# Altium PCB Soccer_Bop_It_Schematic.PcbDoc
Units mil, origin at the board's own origin, x right, y up, seen from the top; angles counter-clockwise.
Board outline 3010 x 2010 mil, 2 copper layers (Top Layer, Bottom Layer); 16 components, 16 nets, 72 pads, 3 vias.
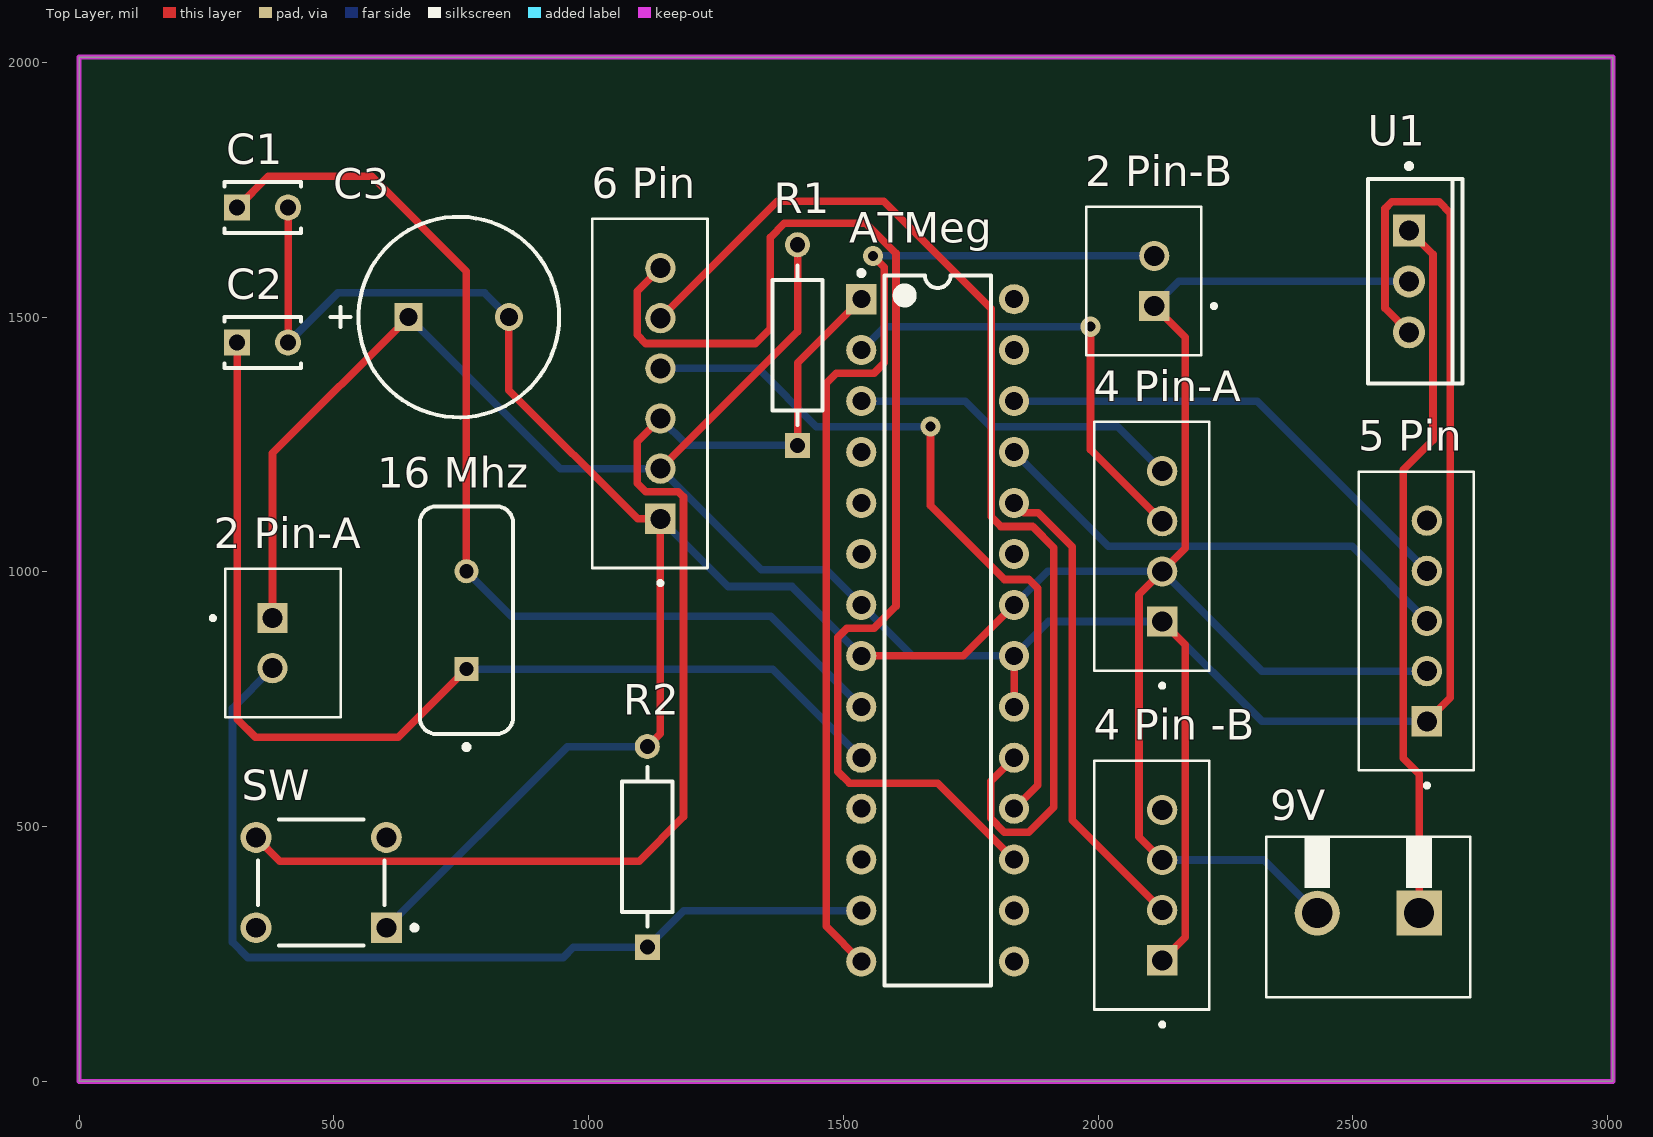
[diagram p0: Top Layer view]
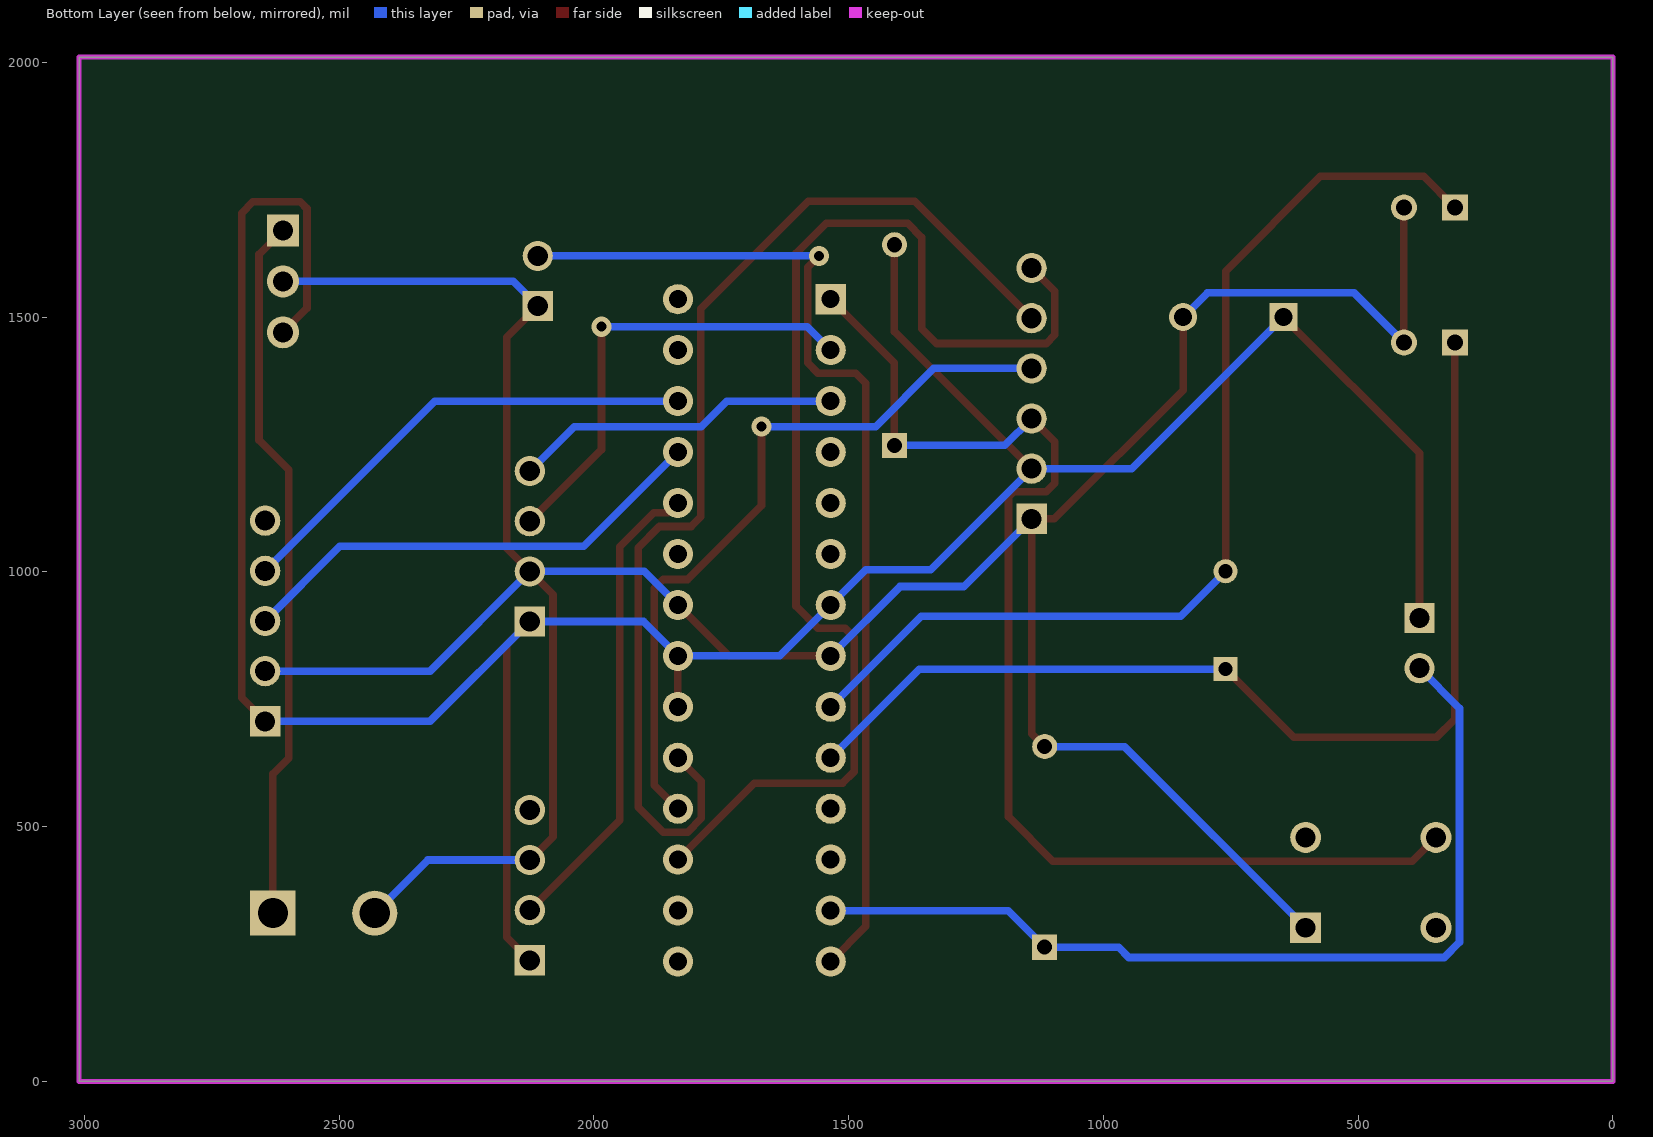
[diagram p1: Bottom Layer view, seen from below]
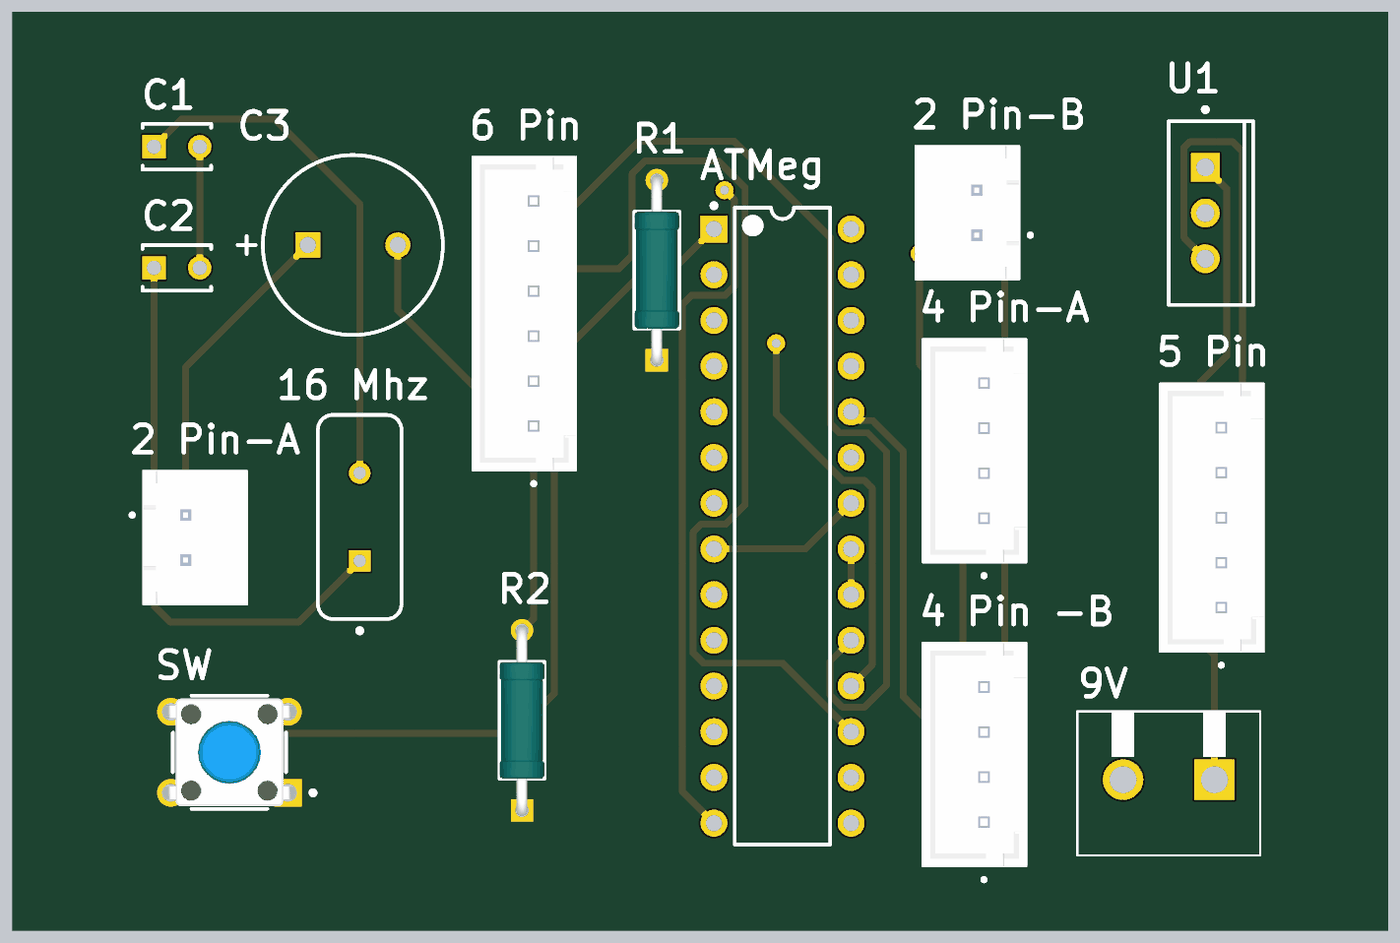
[diagram p2: 3D render of the assembled board from above, using the file's embedded part models]

## Layer stack, top to bottom
Top Solder: solder mask 0.4, Solder Resist, Dk 3.5
Top Layer: signal copper 1.4
Dielectric 1: dielectric 12.6, FR-4, Dk 4.8
Bottom Layer: signal copper 1.4
Bottom Solder: solder mask 0.4, Solder Resist, Dk 3.5

## Board outline
0,0 3010,0 3010,2010 0,2010

## Design rules (kind name [scope] priority, off if disabled: settings)
BoardOutlineClearance [All] p1: gap=7.87 ignorepadtopadclearanceinfootprint=FALSE except(15.75: Arc-SplitBarrior Arc-SplitContinuation Track-SplitBarrior Track-SplitContinuation SMDPad-SplitBarrior SMDPad-SplitContinuation THPad-SplitBarrior THPad-SplitContinuation Via-SplitBarrior Via-SplitContinuation Fill-SplitBarrior Fill-SplitContinuation Poly-SplitBarrior Poly-SplitContinuation Region-SplitBarrior Region-SplitContinuation Text-SplitBarrior Text-SplitContinuation)
Clearance "Clearance Bottom Layer" [OnLayer('Bottom Layer')] p1: gap=8 ignorepadtopadclearanceinfootprint=TRUE except(10: Arc-Text Track-Text SMDPad-Text THPad-Text Via-Text Fill-Text Poly-Text Region-Text Text-Text)
Clearance "Clearance Top Layer" [OnLayer('Top Layer')] p2: gap=8 ignorepadtopadclearanceinfootprint=TRUE except(10: Arc-Text Track-Text SMDPad-Text THPad-Text Via-Text Fill-Text Poly-Text Region-Text Text-Text)
Clearance [All] p3: gap=7.87 ignorepadtopadclearanceinfootprint=FALSE except(3.5: Arc-Arc Arc-Track Arc-SMDPad Track-Track Track-SMDPad SMDPad-SMDPad; 5: Arc-Via Track-Via SMDPad-Via THPad-Via Via-Via; 10: Arc-Text Track-Text SMDPad-Text THPad-Text Via-Text Fill-Text Poly-Text Region-Text Text-Text)
HoleSize [All] p1: absolutevalues=TRUE maxlimit=248.03 minlimit=7.87 maxpercent=80.000 minpercent=20.000
MinimumAnnularRing [All] p1: minimumring=3
MinimumSolderMaskSliver [All] p1: minsoldermaskwidth=3.94
PolygonConnect PolygonConnect_1 [All] p1: thpad.connectstyle=Relief thpad.reliefconductorwidth=20 thpad.reliefentries=4 thpad.polygonreliefangle="90 Angle" thpad.airgapwidth=10 smdpad.connectstyle=Relief smdpad.reliefconductorwidth=20 smdpad.reliefentries=4 smdpad.polygonreliefangle="90 Angle" smdpad.airgapwidth=10 via.connectstyle=Direct via.reliefconductorwidth=20 via.reliefentries=4 via.polygonreliefangle="90 Angle" via.airgapwidth=10
RoutingCorners [All] p1: cornerstyle=Round minsetback=100 maxsetback=100
RoutingVias [All] p1: holewidth=19.68 width=39.37 viastyle="Through Hole" minholewidth=7.87 minwidth=17.72 maxholewidth=39.37 maxwidth=78.74
SilkToSilkClearance [All] p1: silktosilkclearance=3.94
SilkToSolderMaskClearance [IsPad] p1: minsilkscreentomaskgap=3.94 clearancetoexposedcopper=TRUE
SolderMaskExpansion [All] p1: expansion=4 istentingtop=FALSE
Width [All] p1: maxlimit=100 minlimit=3.5 preferedwidth=15
25 further rules are at their usual default settings.

## Components (designator, comment, footprint, x,y, rotation, side; value= is the part's Value field where it differs from the comment)
"2 Pin-A" "Button" JST_B2B-XH-A(LF)(SN) 400,860 r270 top
"2 Pin-B" "Buzzer" JST_B2B-XH-A(LF)(SN) 2089.33,1570.79 r90 top
"4 Pin -B" "Potentiometer" JST_B4B-XH-A(LF)(SN) 2105,385 r90 top
"4 Pin-A" "Screen" JST_B4B-XH-A(LF)(SN) 2105,1050 r90 top
"5 Pin" "Joystick" JST_B5B-XH-A(LF)(SN) 2624.33,903.43 r90 top
"6 Pin" "Pocket Programmer" JST_B6B-XH-A(LF)(SN) 1120,1350 r90 top
9V "Screw Terminal" 1760490000 2630,330 r180 top
"16 Mhz" "Clock" FOX-FOXSLF160-20 760,905 r90 top
ATMeg "ATmega328P-PU" 28P3 1685,885 r0 top
C1 "22 pF" KEMT-C315-THT-2 360,1715 r0 top
C2 "22 pF" KEMT-C315-THT-2 360,1450 r0 top
C3 "10 uF" PNSC-EEU-EE2G100-2_V 745,1500 r0 top
R1 "10k" FP-MRS25-MFG 1410,1445 r90 top
R2 "TBD" FP-MRS25-MFG 1115,460 r90 top
SW "1-1825910-0" FP-1-1825910-0-MFG 475,390 r0 top
U1 "LM7805CT" FAIR-TO-220-3 2610,1570 r0 top

## Footprints (in the part's own frame and the unit in brackets; to place one, negate y for a bottom-side part, rotate by r counter-clockwise, add the part's x,y. Pads: shape width x height; smd on the part's side, far side on the other; paste and mask are expansions set on the pad)
28P3 [mm] "28-Pin Plastic Dual In-Line Package (PDIP)"
  rect 1.5x1.5 hole 0.9: 1(-3.81,16.51)
  round 1.5 hole 0.9: 2(-3.81,13.97) 3(-3.81,11.43) 4(-3.81,8.89) 5(-3.81,6.35) 6(-3.81,3.81) 7(-3.81,1.27) 8(-3.81,-1.27) 9(-3.81,-3.81) 10(-3.81,-6.35) 11(-3.81,-8.89) 12(-3.81,-11.43) 13(-3.81,-13.97) 14(-3.81,-16.51) 15(3.81,-16.51) 16(3.81,-13.97) 17(3.81,-11.43) 18(3.81,-8.89) 19(3.81,-6.35) 20(3.81,-3.81) 21(3.81,-1.27) 22(3.81,1.27) 23(3.81,3.81) 24(3.81,6.35) 25(3.81,8.89) 26(3.81,11.43) 27(3.81,13.97) 28(3.81,16.51)
  silkscreen extent -3.93,-17.7 2.65,17.93, body extent -3.6,-17.65 3.6,17.65, height 4.58
1760490000 [mm]
  rect 2.25x2.25 hole 1.5: 1(0,0)
  round 2.25 hole 1.5: 2(5.08,0)
  silkscreen extent -2.54,-3.81 7.62,4.2
FAIR-TO-220-3 [mm] "FM, 3-Leads, Body 10.2x4.7mm, Pitch 2.54mm"
  rect 1.6x1.6 hole 1: 1(0,2.54)
  round 1.6 hole 1: 2(0,0) 3(0,-2.54)
  silkscreen extent -2.04,-5.1 2.66,5.87, body extent -2.04,-5.1 2.66,5.1, height 18.95
FOX-FOXSLF160-20 [mm] "THD, 2-Leads, Body 11.35x4.65mm"
  rect 1.2x1.2 hole 0.7: 1(-2.44,0)
  round 1.2 hole 0.7: 2(2.44,0)
  silkscreen extent -6.45,-2.33 5.68,2.33, body extent -5.67,-2.32 5.68,2.33, height 3.6
FP-1-1825910-0-MFG [mm]
  rect 1.54x1.54 hole 0.99 paste-1000 mask+0: 1(3.25,-2.25)
  round 1.54 hole 0.99 paste-1000 mask+0: 2(-3.25,-2.25) 3(3.25,2.25) 4(-3.25,2.25)
  silkscreen extent -3.14,-3.14 4.77,3.14, body extent -4.12,-3.24 4.12,3.24, height 0.25
FP-MRS25-MFG [mm]
  rect 1.25x1.25 hole 0.75 paste-1000 mask+0: 1(-5,0)
  round 1.25 hole 0.75 paste-1000 mask+0: 2(5,0)
  silkscreen extent -3.97,-1.25 3.97,1.25, body extent -5.72,-1.35 5.72,1.35, height 0.25
JST_B2B-XH-A(LF)(SN) [mm]
  rect 1.508x1.508 hole 1: 1(-1.25,-0.525)
  round 1.508 hole 1: 2(1.25,-0.525)
  silkscreen extent -3.7,-3.6 3.7,2.87, body extent -3.7,-2.88 3.7,2.88, height 7
JST_B4B-XH-A(LF)(SN) [mm]
  rect 1.508x1.508 / inner round 1.508 / far side rect 1.508x1.508 hole 1: 1(-3.75,-0.525)
  round 1.508 hole 1: 2(-1.25,-0.525) 3(1.25,-0.525) 4(3.75,-0.525)
  silkscreen extent -7.05,-2.88 6.2,2.87, body extent -6.2,-2.88 6.2,2.88, height 7
JST_B5B-XH-A(LF)(SN) [mm]
  rect 1.508x1.508 hole 1: 1(-5,-0.525)
  round 1.508 hole 1: 2(-2.5,-0.525) 3(0,-0.525) 4(2.5,-0.525) 5(5,-0.525)
  silkscreen extent -8.3,-2.88 7.45,2.87, body extent -7.45,-2.88 7.45,2.88, height 7
JST_B6B-XH-A(LF)(SN) [mm]
  rect 1.508x1.508 hole 1: 1(-6.25,-0.525)
  round 1.508 hole 1: 2(-3.75,-0.525) 3(-1.25,-0.525) 4(1.25,-0.525) 5(3.75,-0.525) 6(6.25,-0.525)
  silkscreen extent -9.55,-2.88 8.7,2.87, body extent -8.7,-2.88 8.7,2.88, height 7
KEMT-C315-THT-2 [mm] "THD, 2-Leads, Body 3.81x2.54mm"
  rect 1.3x1.3 hole 0.8: 1(-1.27,0)
  round 1.3 hole 0.8: 2(1.27,0)
  silkscreen extent -1.91,-1.27 1.91,1.27, body extent -1.91,-1.27 1.91,1.27, height 4.66
PNSC-EEU-EE2G100-2_V [mm] "Through-hole, 2-Leads, Base 10x10mm, Height 22mm"
  rect 1.4x1.4 hole 0.9: 1(-2.5,0)
  round 1.4 hole 0.9: 2(2.5,0)
  silkscreen extent -6.4,-5 5,5, body extent -5,-5 5,5, height 22

## Part data
"2 Pin-A" "2 Pin-B": library part B2B-XH-A(LF)(SN), "Connector Header Through Hole 2 position 0.098\" (2.50mm)", Package=None, Availability=Unavailable, Check_prices=https://www.snapeda.com/parts/B2B-XH-A(LF)(SN)/JST+Sales+America+Inc./view-part/?ref=eda, MF="JST Sales", MP=B2B-XH-A(LF)(SN), Price=None, SnapEDA_Link=https://www.snapeda.com/parts/B2B-XH-A(LF)(SN)/JST+Sales+America+Inc./view-part/?ref=snap
"4 Pin -B": library part B4B-XH-A(LF)(SN), Package=None, Availability="In Stock", Check_prices=https://www.snapeda.com/parts/B4B-XH-A(LF)(SN)/JST+Sales+America+Inc./view-part/?ref=eda, MF="JST Sales", MP=B4B-XH-A(LF)(SN), Price=None, Purchase-URL=https://pricing.snapeda.com/search/part/B4B-XH-A(LF)(SN)/?ref=eda, SnapEDA_Link=https://www.snapeda.com/parts/B4B-XH-A(LF)(SN)/JST+Sales+America+Inc./view-part/?ref=snap
"4 Pin-A": library part B4B-XH-A(LF)(SN), "Connector Header Through Hole 4 position 0.098 (2.50mm)", Package=None, Availability="In Stock", Check_prices=https://www.snapeda.com/parts/B4B-XH-A(LF)(SN)/JST+Sales+America+Inc./view-part/?ref=eda, MF="JST Sales", MP=B4B-XH-A(LF)(SN), Price=None, Purchase-URL=https://pricing.snapeda.com/search/part/B4B-XH-A(LF)(SN)/?ref=eda, SnapEDA_Link=https://www.snapeda.com/parts/B4B-XH-A(LF)(SN)/JST+Sales+America+Inc./view-part/?ref=snap
"5 Pin": library part B5B-XH-A(LF)(SN), "Connector Header Through Hole 5 position 0.098 (2.50mm)", Package=None, Availability="In Stock", Check_prices=https://www.snapeda.com/parts/B5B-XH-A(LF)(SN)/JST+Sales+America+Inc./view-part/?ref=eda, MF="JST Sales America Inc.", MP=B5B-XH-A(LF)(SN), Price=None, Purchase-URL=https://pricing.snapeda.com/search/part/B5B-XH-A(LF)(SN)/?ref=eda, SnapEDA_Link=https://www.snapeda.com/parts/B5B-XH-A(LF)(SN)/JST+Sales+America+Inc./view-part/?ref=snap
"6 Pin": library part B6B-XH-A(LF)(SN), "Connector Header Through Hole 6 position 0.098 (2.50mm)", Package=None, Availability="In Stock", Check_prices=https://www.snapeda.com/parts/B6B-XH-A(LF)(SN)/JST+Sales+America+Inc./view-part/?ref=eda, MF="JST Sales", MP=B6B-XH-A(LF)(SN), Price=None, Purchase-URL=https://pricing.snapeda.com/search/part/B6B-XH-A(LF)(SN)/?ref=eda, SnapEDA_Link=https://www.snapeda.com/parts/B6B-XH-A(LF)(SN)/JST+Sales+America+Inc./view-part/?ref=snap
9V: library part 1760510000, "2 Position Wire to Board Terminal Block Horizontal with Board 0.200 _5.08mm_ Through Hole", Package=None, Availability=Unavailable, MF=Weidmuller, MP=1760510000, Price=None, SnapEDA_Link=https://www.snapeda.com/parts/1760510000/Weidmuller/view-part/286722/?ref=snap
"16 Mhz": library part CMP-1749-00003-1, "Resistance Weld Thru-Hole Crystal, 16 MHz, -20 to 70 degC, 2-Pin THD, RoHS, Bulk", Case\Package=Axial, Max Operating Temperature="155 degC", Min Operating Temperature="-55 degC", Package Quantity=200, Power Rating="250 mW", Resistance="221 kohm", Tolerance=1%, Voltage Rating="250 V", ComponentLink1Description="Manufacturer URL", ComponentLink1URL=http://www.foxonline.com/, ComponentLink2Description=Datasheet, ComponentLink2URL=http://www.foxonline.com/pdfs/hc49slf.pdf, DatasheetVersion=Mar-15, Length="0.248 inch", Mount="Through Hole", PackageDescription="2-Pin Through Hole Device, Body 11.35 x 4.65 mm", PackageReference=FOXSLF160-20, Packaging=Bulk, RoHSCompliant=true
ATMeg: library part CMP-0095-00013-2, "8-bit AVR Microcontroller, 32KB Flash, 1KB EEPROM, 2KB SRAM, 28-pin PDIP, Industrial Grade (-40°C to 85°C)", ComponentLink1Description="Manufacturer URL", ComponentLink1URL=http://www.atmel.com/, ComponentLink2Description="ATmega48A/48PA/88A/88PA/168A/168PA/328/328P Datasheet", ComponentLink2URL=http://www.atmel.com/dyn/resources/prod_documents/8271.pdf, ComponentLink3Description="ATmega48A/48PA/88A/88PA/168A/168PA/328/328P Summary", ComponentLink3URL=http://www.atmel.com/dyn/resources/prod_documents/8271S.pdf, DatasheetVersion="revD, May-2011", PackageDescription="28-lead (0.300\"/7.62mm Wide) Plastic Dual Inline Package (PDIP)", PackageReference=28P3, PackageVersion="revB, Sep-2001", RevisionNote="DatasheetVersion updated. URLs added."
C1 C2: library part CMP-1664-00008-1, "Capacitor, Ceramic, 22 pF, +/-10 %, 100 V, -55 to 125 degC, 2-Pin THD, RoHS, Bulk", Case\Package=TO-220, Max Input Voltage="40 V", Max Operating Temperature="125 degC", Max Ouput Current="1.5 A", Min Input Voltage="4.2 V", Min Operating Temperature="0 degC", Output Voltage="1.2 V", Package Quantity=50, ComponentLink1Description="Manufacturer URL", ComponentLink1URL=http://www.kemet.com/, ComponentLink2Description=Datasheet, ComponentLink2URL=http://capacitoredge.kemet.com/capedge2/DataSheet/Datasheet-C315C220K1G5TA.pdf?pn=C315C220K1G5TA{BULK}, DatasheetVersion=Aug-16, Height="9.28 mm", Length="10.28 mm", Mount="Through Hole", Output Current="1.5 A", Outputs=1, PackageDescription="2-Pin Through Hole Device, Body 3.81 x 2.54 mm", PackageReference=C315-THT-2, Packaging=Rail/Tube, Pins=3, Radiation Hardening=No, REACH SVHC="No SVHC", RoHSCompliant=true, Weight="0.08113 oz", Width="4.82 mm"
C3: library part CMP-0736-00002-1, "Aluminum Electrolytic Capacitor, 10 uF +/- 20%, 400 V, -25 to 105 degC, 2-Pin 10 x 10 x 22 mm Through-hole, RoHS, Tape and Reel", Capacitance Tolerance="+/- 20%", Manufacturer=Panasonic, PartNumber=EEU-EE2G100, Rated Voltage="400 V", Ripple Current="430 mA", Temp. Range="-25 to 105 degC", Cap.="10 uF", ComponentLink1Description="Manufacturer URL", ComponentLink1URL=http://industrial.panasonic.com/, ComponentLink2Description=Datasheet, ComponentLink2URL=http://industrial.panasonic.com/www-data/pdf/ABA0000/ABA0000CE113.pdf, ComponentLink3Description="Package Specification", ComponentLink3URL=http://industrial.panasonic.com/www-data/pdf/ABA0000/ABA0000PE245.pdf, DatasheetVersion=Nov-12, Mounting Technology="Through Hole", PackageDescription="2-Pin Through-hole, Base 10 x 10 mm, Height 22 mm", PackageReference=EEU-EE2G100-2, PackageVersion=Nov-12, Packing="Tape and Reel", RoHS=TRUE
R1 R2: library part CMP-02408-000051-1, "RES 1K OHM 0.6W 1% AXIAL", Case/Package=Axial, Max Operating Temperature=155°C, Max Power Dissipation=600mW, Min Operating Temperature=-55°C, Package Quantity=5000, Resistance=1kR, Resistance Tolerance=1%, Resistor Type="Metal Film", Temperature Coefficient=50ppm/°C, Voltage Rating=350V, Construction=Cylindrical, Contact Plating=Tin, Diameter=2.5mm, Lead Diameter=0.6mm, Lead Free="Lead Free", Length=6.5mm, Military Standard=Not, Mount="Through Hole", Number of Pins=2, Number of Terminations=2, Packaging="Tape and Reel", Power Rating=600mW, Radiation Hardening=No, RoHS Compliant=Yes, Series=MRS25, Technology="THIN FILM", Termination=Axial, Tolerance=1%, Voltage Rating (DC)=350V, Weight=0.00776oz, Width=2.5mm
SW: library part CMP-03407-000018-1, "SWITCH TACTILE SPST-NO 0.05A 24V", Actuator Color=Blue, Contact Current Rating=50mA, Contact Resistance=100mR, Max Operating Temperature=85°C, Max Voltage Rating (DC)=24V, Min Operating Temperature=-35°C, Operating Force=1.56N, Package Quantity=750, Actuator Length=3.4mm, Actuator Material=Nylon, Actuator Type=Standard, Contact Material=Brass, Contact Plating=Silver, Depth=5.99mm, Electrical Life=100000Cycles, Illumination Type=Non-Illuminated, Length=5.99mm, Max Current Rating=50mA, Mechanical Life=100000Cycles, Mount="Through Hole", Orientation=Straight, Packaging="Loose Piece", Radiation Hardening=No, RoHS Compliant=Yes, Series="FSMJ, Alcoswitch", Switch Function=Off-Mom, Switch Travel=0.25mm, Termination="PC Pins", Throw Configuration=SPST, Type=Switch, Voltage Rating (DC)=24V
U1: library part CMP-2000-04938-1, "Positive Voltage Regulator, 5 V, 1 A, -40 to 125 degC, 3-Pin TO-220, RoHS, Tube", Manufacturer=FairchildSemiconductor, Maximum Input Voltage=35V, Maximum Output Current=2.2(Typ)A, Maximum Quiescent Current=8mA, Operating Temperature=-40to125degC, Output Voltage=5V, Package=3TO-220AB, Package Description="3-Pin Through Hole Device, Body 10 x 4.5 mm, Pitch 2.54 mm", Package Reference=TO-220, Typical Dropout Voltage @ Current=2@1AV, Accuracy=±4%, Category=LinearRegulator, Datasheet URL=https://datasheet.ciiva.com/26904/lm7805ct-26904988.pdf, Datasheet Version=Aug-12, Line Regulation=100mV, Load Regulation=100mV, Manufacturer URL=https://www.fairchildsemi.com/, Mounting=ThroughHole, Number of Outputs=1, Output Type=Fixed, Package URL=https://www.fairchildsemi.com/package-drawings/TO/TO220B03.pdf, Packaging=Rail/Tube, Polarity=Positive, Rad Hard=No, Type=Linear

## Via types
v1: diameter 39.37, hole 19.68, Top Layer to Bottom Layer, 3 vias

## Nets (pads, with @x,y where several pads share a name; then routed paths per layer and width w, separated by ;. In a path a pad name is that pad's centre, name@x,y a point inside that pad or via, vN(x,y) a via of type N, cw(c..) or ccw(c..) an arc to the next point about the centre after c; other vN are vias at no path point)
GND: 9V.2 "2 Pin-B.1" "4 Pin -B.3" "4 Pin-A.2" "5 Pin.2" "6 Pin.1" ATMeg.8 ATMeg.22 C1.2 C2.2 C3.2 R2.2 SW.1 U1.2 | length 6223.5
  Top Layer w15: C2.2 C1.2 ; C3.2 843.43,1356.61 1096.1,1103.94 1140.67,1103.94 1140.67,682.52 R2.2 ; ATMeg.8 1735,835 ATMeg.22 ; 2110,1521.58 2171,1460.58 2171,1046.12 2125.67,1000.79 2080,955.12 2080,479.88 2125.67,434.21
  Bottom Layer w15: C2.2 508,1548 795.43,1548 C3.2 ; SW.1 958.38,656.85 R2.2 ; 1140.67,1103.94 1273.61,971 1399,971 ATMeg.8 ; ATMeg.22 1900.79,1000.79 2125.67,1000.79 2321.46,805 2645,805 ; 2110,1521.58 2158.42,1570 U1.2 ; 2125.67,434.21 2325.79,434.21 9V.2
"Net2 Pin-A_1": "2 Pin-A.1" "4 Pin -B.1" "4 Pin-A.1" "5 Pin.1" "6 Pin.2" ATMeg.7 ATMeg.20 ATMeg.21 C3.1 R1.2 U1.3 | length 5859.4
  Top Layer w15: 379.33,909.21 379.33,1232.76 C3.1 ; 1140.67,1202.36 1410,1471.69 R1.2 ; ATMeg.20 ATMeg.21 ; 2125.67,237.36 2171,282.69 2171,857.03 2125.67,902.36 ; U1.3 2563,1517 2563,1713 2576,1726 2669,1726 2691,1704 2691,752.58 2645,706.58
  Bottom Layer w15: C3.1 944.21,1202.36 1140.67,1202.36 1339.03,1004 1466,1004 ATMeg.7 1635,835 ATMeg.21 1902.36,902.36 2125.67,902.36 2321.46,706.58 2645,706.58
"Net2 Pin-A_2": "2 Pin-A.2" ATMeg.13 R2.1 | length 1854.8
  Bottom Layer w15: 379.33,810.79 301,732.46 301,273 331,243 949.85,243 970,263.15 R2.1 1186.85,335 ATMeg.13
"Net2 Pin-B_2": "2 Pin-B.2" ATMeg.14 | length 2065.3
  Top Layer w15: ATMeg.14 1466,304 1466,1369.97 1486,1389.97 1560,1389.97 1580.03,1410 1580.03,1597.97 v1(1558,1620)
  Bottom Layer w15: v1(1558,1620) 2110,1620
"Net4 Pin -B_2": "4 Pin -B.2" ATMeg.24 | length 936
  Top Layer w15: ATMeg.24 1854.1,1115.9 1882.13,1115.9 1949,1049.03 1949,512.46 2125.67,335.79
"Net4 Pin-A_3": "4 Pin-A.3" ATMeg.2 | length 909.1
  Top Layer w15: v1(1985,1481) 1985,1239.88 2125.67,1099.21
  Bottom Layer w15: ATMeg.2 1581,1481 v1(1985,1481)
"Net4 Pin-A_4": "4 Pin-A.4" ATMeg.3 | length 647.6
  Bottom Layer w15: ATMeg.3 1739,1335 1789,1285 2038.31,1285 2125.67,1197.64
"Net5 Pin_3": "5 Pin.3" ATMeg.25 | length 947.3
  Bottom Layer w15: ATMeg.25 2020,1050 2498.43,1050 2645,903.43
"Net5 Pin_4": "5 Pin.4" ATMeg.26 | length 948
  Bottom Layer w15: ATMeg.26 2311.85,1335 2645,1001.85
"Net6 Pin_3": "6 Pin.3" ATMeg.1 R1.1 SW.4 | length 2399.9
  Top Layer w15: SW.4 393.63,432 1099,432 1186,519 1186,1147 1176,1157 1112,1157 1095,1174 1095,1255.12 1140.67,1300.79 ; R1.1 1410,1410 ATMeg.1
  Bottom Layer w15: 1140.67,1300.79 1193.31,1248.15 R1.1
"Net6 Pin_4": "6 Pin.4" ATMeg.18 | length 1461.8
  Top Layer w15: v1(1670.97,1285) 1670.97,1130.03 1816,985 1864,985 1881,968 1881,581 ATMeg.18
  Bottom Layer w15: 1140.67,1399.21 1332.79,1399.21 1447,1285 v1(1670.97,1285)
"Net6 Pin_5": "6 Pin.5" ATMeg.19 | length 2190.6
  Top Layer w15: 1140.67,1497.64 1370.03,1727 1579,1727 1789.97,1516.03 1789.97,1108.03 1809,1089 1871.03,1089 1913,1047.03 1913,538 1864,489 1816,489 1789,516 1789,589 ATMeg.19
"Net6 Pin_6": "6 Pin.6" ATMeg.17 | length 2405
  Top Layer w15: 1140.67,1596.06 1095,1550.39 1095,1465 1112,1448 1327,1448 1356,1477 1356,1656 1384,1684 1544,1684 1603.03,1624.97 1603.03,932.03 1560,889 1507,889 1489,871 1489,608 1512,585 1685,585 ATMeg.17
"Net16 Mhz_1": "16 Mhz.1" ATMeg.10 C2.1 | length 2106.4
  Top Layer w15: C2.1 310,711 346,675 626.06,675 760,808.94
  Bottom Layer w15: 760,808.94 1361.06,808.94 ATMeg.10
"Net16 Mhz_2": "16 Mhz.2" ATMeg.9 C1.1 | length 2026.5
  Top Layer w15: C1.1 371,1776 574,1776 760,1590 760,1001.06
  Bottom Layer w15: 760,1001.06 848.06,913 1357,913 ATMeg.9
VCC: 9V.1 U1.1 | length 1396.3
  Top Layer w15: U1.1 2657,1623 2657,1258 2599,1200 2599,634 2630,603 9V.1
pads on no net: "4 Pin -B.4" "5 Pin.5" ATMeg.4 ATMeg.5 ATMeg.6 ATMeg.11 ATMeg.12 ATMeg.15 ATMeg.16 ATMeg.23 ATMeg.27 ATMeg.28 SW.2 SW.3

## Keep-outs
Keep-Out Layer:
  the board outline again, w10